# Altium PCB IPG_Rigid.PcbDoc (part 4 of 13)
Units mm, origin at the board's own origin, x right, y up, seen from the top; angles counter-clockwise.
Board outline 69.6 x 90.73 mm, 10 copper layers (TOP, DHOR, DVERT, GND 1, POWER, GND 2, GND 3, AVERT, AHOR, BOT), stack 1.198 mm thick; 745 components, 398 nets, 1997 pads, 2678 vias.
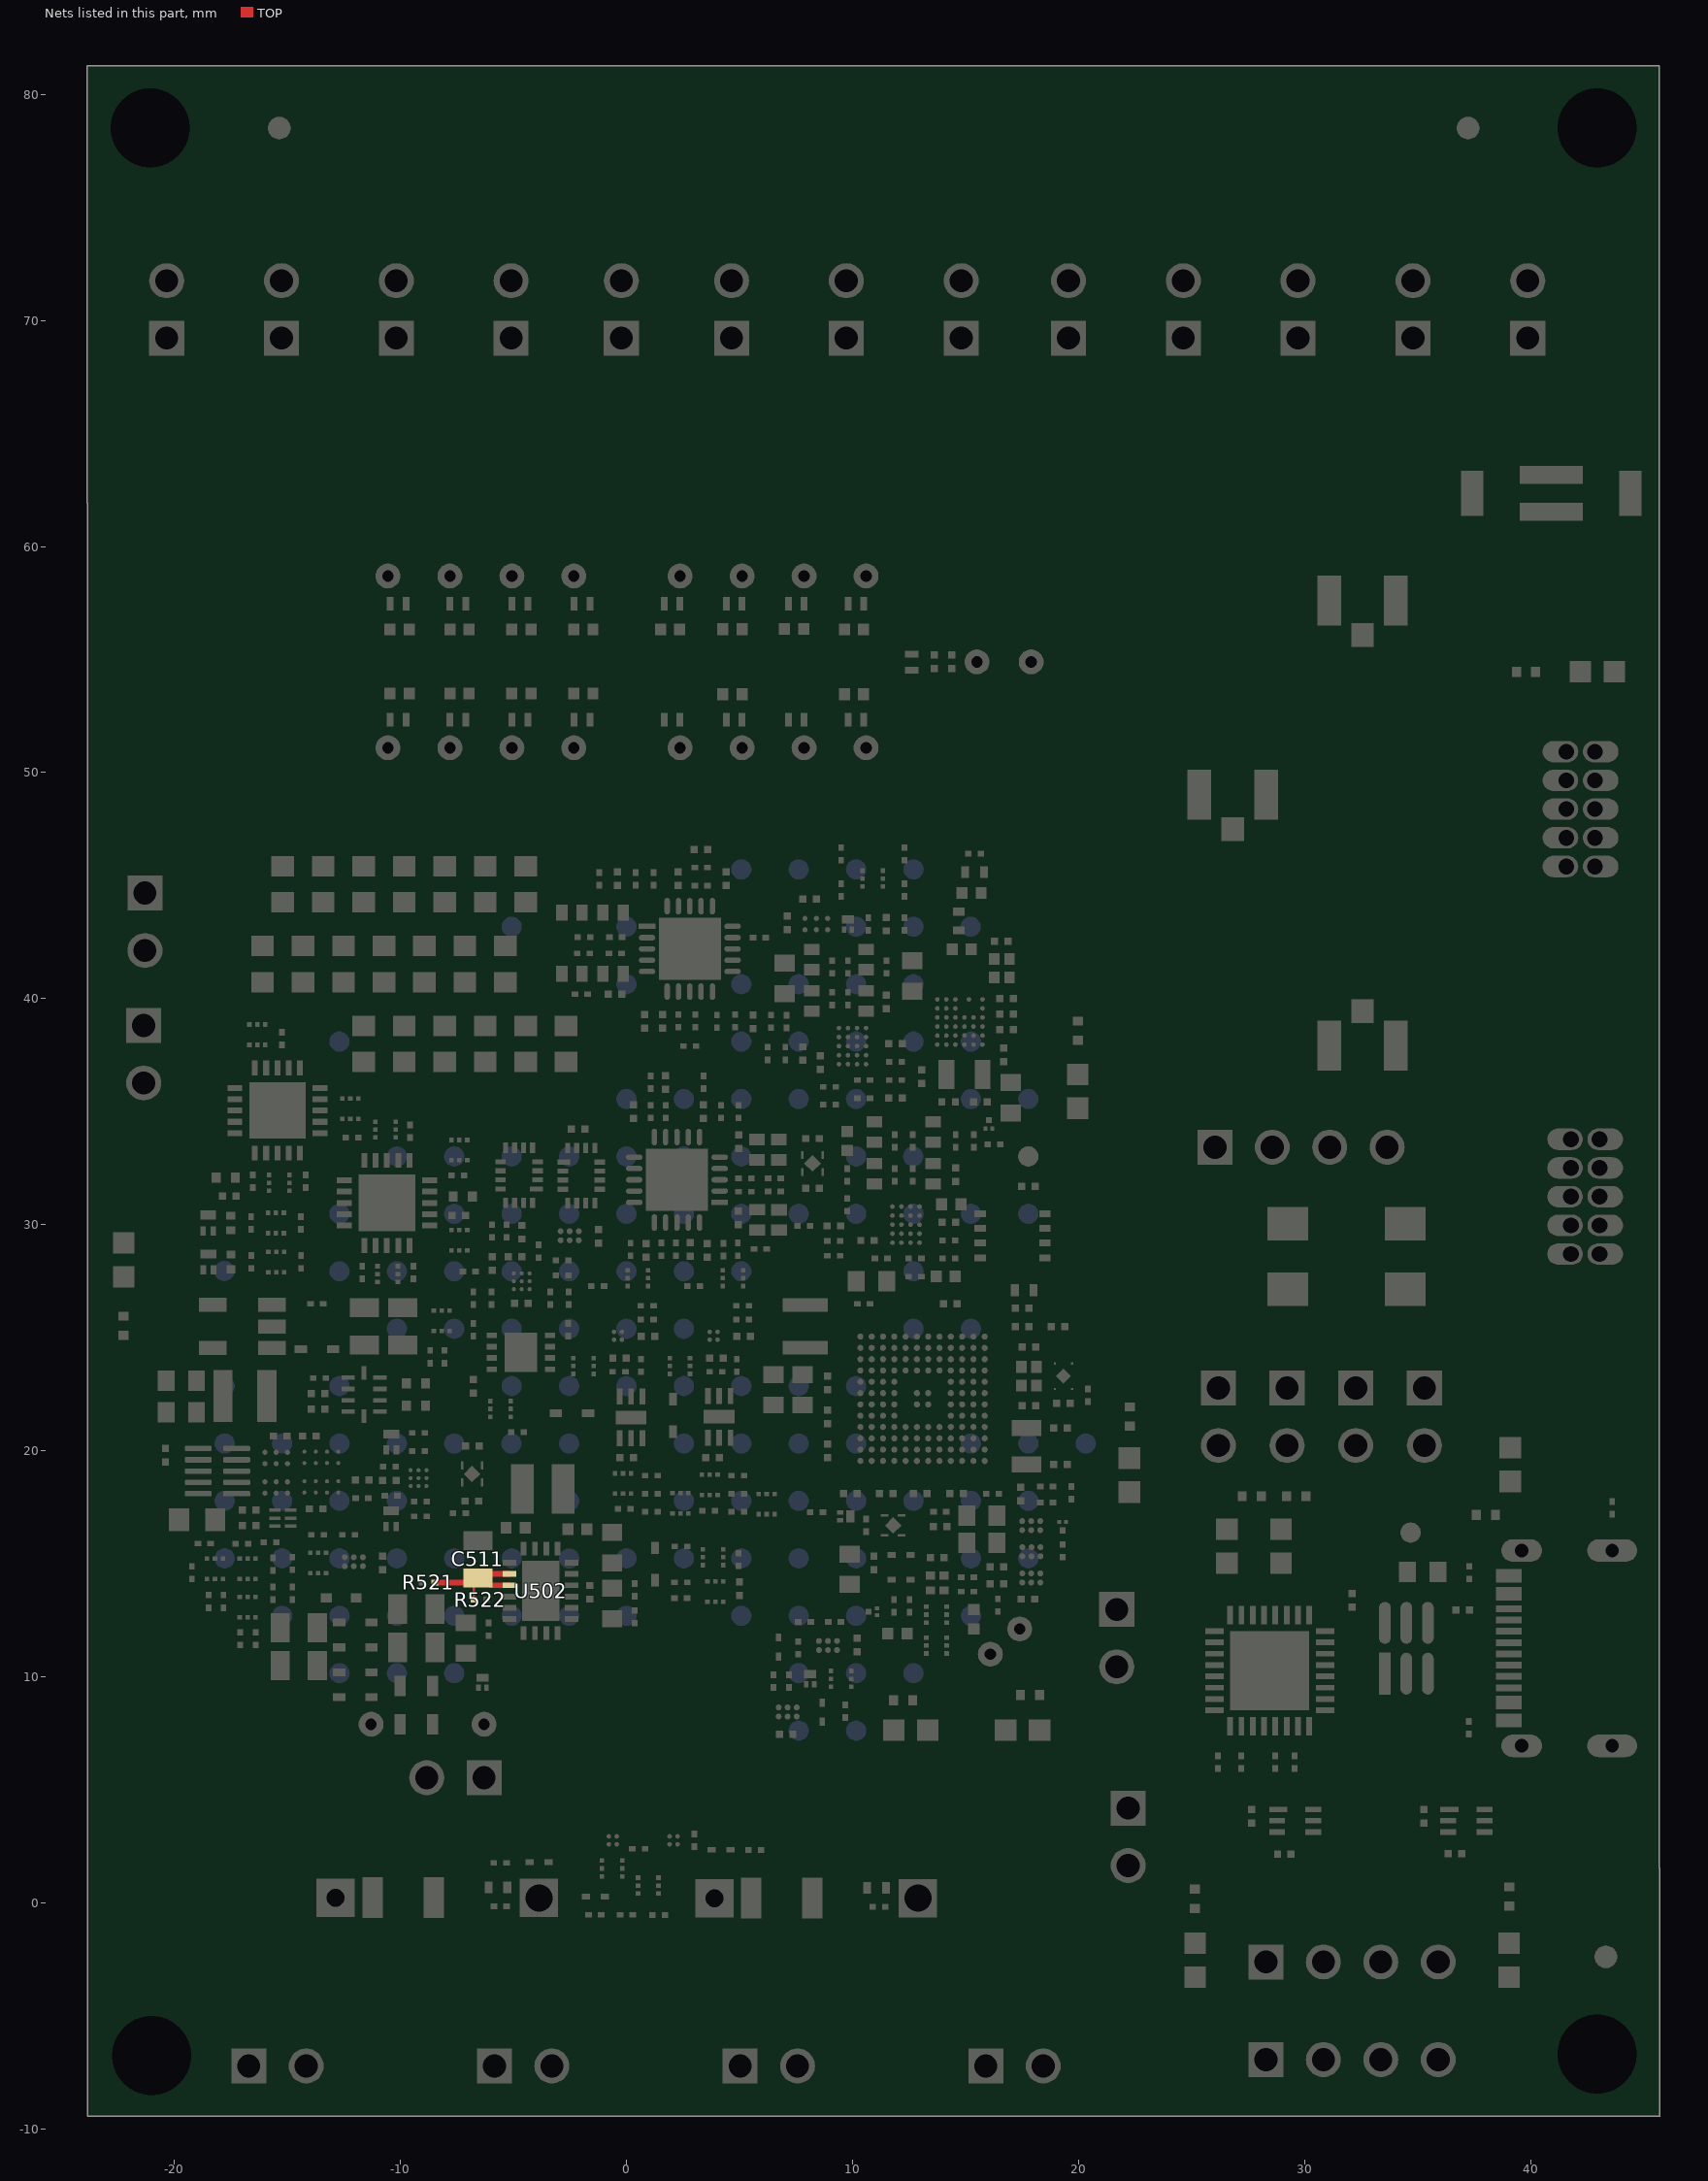
[diagram p11: the nets of this part, all layers, seen from the top]

## Part data (continued)
C602 C605: "Ceramic Capacitor, Multilayer, Ceramic, 25V, 10% +Tol, 10% -Tol, X7R, 15% TC, 0.00047uF, Surface Mount, 0201", Capacitor Type=Ceramic, Case/Package=0201, Manufacturer=Murata, Max Operating Temperature=125°C, Min Operating Temperature=-55°C, Package Shape=Rectangular, Package Style=SMTMeter, Rated DC Voltage (URdc)=25V, Supplier Part Number=490-17744-1-ND, Temperature Characteristics Code=X7R, Tolerance  (fill in as +-)=10%, Category="Ceramic Capacitors", ComponentLink1Description=https://psearch.en.murata.com:443/capacitor/product/GCM033R71E471KA03%23.pdf?src-supplier=IHS+Markit, ComponentLink1URL=https://psearch.en.murata.com:443/capacitor/product/GCM033R71E471KA03%23.pdf?src-supplier=IHS+Markit, ComponentLink2Description=https://datasheet.ciiva.com/11604/product-11604532.pdf?src-supplier=Avnet, ComponentLink2URL=https://datasheet.ciiva.com/11604/product-11604532.pdf?src-supplier=Avnet, ComponentLink3Description=https://datasheet.ciiva.com/163/s0717e-163390.pdf?src-supplier=Digikey, ComponentLink3URL=https://datasheet.ciiva.com/163/s0717e-163390.pdf?src-supplier=Digikey, Dielectric Material=Ceramic, Height=0.33mm, JESD-609 Code=e3, Length=0.6mm, Manufacturer Part Number=GCM033R71E471KA03D, Mounting Technology="Surface Mount", Multilayer=Yes, Packaging="Tape and Reel", Pins=2, Pricing="1=0,1, 10=0,028, 50=0,016, 100=0,0125, 500=0,00938, 1000=0,00736, 2500=0,0067, 5000=0,00616 (USD)", Reach SVHC Compliant=Yes, Reference Standard=AEC-Q200, RoHS=Yes, RoHS Compliant=Yes, Stock=21174, Supplier=Digikey, Supplier 1="Arrow Electronics", Supplier Part Number 1=GCM033R71E471KA03D, Terminal Finish=Nickel, Termination=Wraparound, Tolerance (fill in as +-)=10%, Width=0.3mm
C800: "Capacitor, 10uf, X5R, 10V, 20%, 0402, Implant-grade", Manufacturer=Murata, Medical Grade MFR=TBD, Package Description=0402, Rating=10V, Supplier Part Number 1=2114729, Category=Capacitor, Length (mm)="1.00 ±0.22", Manufacturer Part Number=ZRB15XR61A106ME01D, Medical Grade MFR PN=TBD, PCB Footprint=cap0402_reduced, Supplier 1="Future Electronics", Thickness (mm)="0.65 ±0.2", Width (mm)="0.50 ±0.2"
C802: "Capacitor, 10uf, X5R, 10V, 20%, 0402, Implant-grade", Manufacturer=Murata, Medical Grade MFR=TBD, Package Description=0402, Rating=10V, Category=Capacitor, Length (mm)="1.00 ±0.22", Manufacturer Part Number=ZRB15XR61A106ME01D, Medical Grade MFR PN=TBD, PCB Footprint=cap0402_reduced, Supplier 1="Arrow Electronics", Supplier Part Number 1=ZRB15XR61A106ME01D, Thickness (mm)="0.65 ±0.2", Width (mm)="0.50 ±0.2"
C1000 C1015: "Ceramic Capacitor, Multilayer, Ceramic, 6.3V, 20% +Tol, 20% -Tol, X5R, 15% TC, 1.5uF, Surface Mount, 0201", Capacitor Type=Ceramic, Case/Package=0201, Manufacturer=Murata, Max Operating Temperature=85°C, Min Operating Temperature=-55°C, Package Shape=Rectangular, Rated DC Voltage (URdc)=6.3V, Supplier Part Number=490-13223-1-ND, Temperature Characteristics Code=X5R, Tolerance  (fill in as +-)=20%, Category="Ceramic Capacitors", ComponentLink1Description=https://psearch.en.murata.com:443/capacitor/product/GRM033R60J155ME14%23.pdf?src-supplier=IHS+Markit, ComponentLink1URL=https://psearch.en.murata.com:443/capacitor/product/GRM033R60J155ME14%23.pdf?src-supplier=IHS+Markit, ComponentLink2Description=http://search.murata.co.jp/Ceramy/image/img/A01X/G101/ENG/GRM033R60J155ME14-01.pdf?src-supplier=Digikey, ComponentLink2URL=http://search.murata.co.jp/Ceramy/image/img/A01X/G101/ENG/GRM033R60J155ME14-01.pdf?src-supplier=Digikey, ComponentLink3Description=http://search.murata.co.jp/Ceramy/image/img/A01X/partnumbering_e_01.pdf?src-supplier=Digikey, ComponentLink3URL=http://search.murata.co.jp/Ceramy/image/img/A01X/partnumbering_e_01.pdf?src-supplier=Digikey, Dielectric Material=Ceramic, Manufacturer Part Number=GRM033R60J155ME14D, Mounting Technology="Surface Mount", Multilayer=Yes, Packaging="Tape and Reel", Pins=2, Pricing="1=0,2, 10=0,131, 50=0,083, 100=0,0664, 500=0,04794, 1000=0,04241, 2500=0,04056, 5000=0,03687 (USD)", Reach SVHC Compliant=Yes, RoHS=Yes, RoHS Compliant=Yes, Stock=47845, Supplier=Digikey, Supplier 1="Arrow Electronics", Supplier Part Number 1=GRM033R60J155ME14D, Termination=Wraparound, Tolerance (fill in as +-)=20%
C1001 C1007 C1016 C1022: "Ceramic Capacitor, Multilayer, Ceramic, 16V, 20% +Tol, 20% -Tol, X5R, 15% TC, 0.018uF, Surface Mount, 0201", Capacitor Type=Ceramic, Case/Package=0201, Manufacturer=Murata, Max Operating Temperature=85°C, Min Operating Temperature=-55°C, Package Shape=Rectangular, Package Style=SMTMeter, Rated DC Voltage (URdc)=16V, Supplier Part Number 1=490-10414-1-ND, Temperature Characteristics Code=X5R, Tolerance  (fill in as +-)=20%, Category="Ceramic Capacitors", ComponentLink1Description=https://psearch.en.murata.com:443/capacitor/product/GRM033R61C223ME84%23.pdf?src-supplier=IHS+Markit, ComponentLink1URL=https://psearch.en.murata.com:443/capacitor/product/GRM033R61C223ME84%23.pdf?src-supplier=IHS+Markit, ComponentLink2Description=http://www.farnell.com/datasheets/2735417.pdf?src-supplier=Farnell, ComponentLink2URL=http://www.farnell.com/datasheets/2735417.pdf?src-supplier=Farnell, ComponentLink3Description=http://search.murata.co.jp/Ceramy/image/img/A01X/G101/ENG/GRM033R61C223ME84-01.pdf?src-supplier=Digikey, ComponentLink3URL=http://search.murata.co.jp/Ceramy/image/img/A01X/G101/ENG/GRM033R61C223ME84-01.pdf?src-supplier=Digikey, Dielectric Material=Ceramic, Height=0.3mm, JESD-609 Code=e3, Length=0.6mm, Manufacturer Part Number=GRM033R61C183KE84D, Mounting Technology="Surface Mount", Multilayer=Yes, Packaging="Tape and Reel", Pins=2, Pricing="1=0,1, 10=0,044, 50=0,0254, 100=0,0196, 500=0,01478, 1000=0,01161, 2500=0,01056, 5000=0,00971 (USD)", Reach SVHC Compliant=Yes, RoHS=Yes, RoHS Compliant=Yes, Stock=109140, Supplier 1=Digikey, Terminal Finish=Nickel, Termination=Wraparound, Tolerance (fill in as +-)=20%, Width=0.3mm
C1002 C1008: "Capacitor, 0.33uF, X7S, 16V, 10%, 0402", Manufacturer=TDK, Medical Grade MFR=TBD, Package Description=0402, Rating=16V, Category=Capacitor, Length (mm)="1.00 ±0.05", Manufacturer Part Number=CGA2B1X7S1C334K050BC, Medical Grade MFR PN=TBD, PCB Footprint=cap0402_reduced, Review=020823, Status=Approved, Supplier 1="Arrow Electronics", Supplier Part Number 1=CGA2B1X7S1C334K050BC, Thickness (mm)="0.50 ±0.05", Width (mm)="0.50 ±0.05"
C1009 C1010 C1013 C1024 C1025: "Ceramic Capacitor, Multilayer, Ceramic, 25V, 10% +Tol, 10% -Tol, X7R, 15% TC, 0.001uF, Surface Mount, 0201", Capacitor Type=Ceramic, Case/Package=0201, Manufacturer=Murata, Max Operating Temperature=125°C, Min Operating Temperature=-55°C, Package Shape=Rectangular, Package Style=SMTMeter, Rated DC Voltage (URdc)=25V, Supplier Part Number=490-8161-1-ND, Temperature Characteristics Code=X7R, Tolerance  (fill in as +-)=10%, Category="Ceramic Capacitors", ComponentLink1Description=https://psearch.en.murata.com:443/capacitor/product/GRM033R71E102KA01%23.pdf?src-supplier=IHS+Markit, ComponentLink1URL=https://psearch.en.murata.com:443/capacitor/product/GRM033R71E102KA01%23.pdf?src-supplier=IHS+Markit, ComponentLink2Description=https://datasheet.ciiva.com/5453/product-5453157.pdf?src-supplier=Mouser, ComponentLink2URL=https://datasheet.ciiva.com/5453/product-5453157.pdf?src-supplier=Mouser, ComponentLink3Description=https://datasheet.ciiva.com/11621/product-11621675.pdf?src-supplier=Avnet, ComponentLink3URL=https://datasheet.ciiva.com/11621/product-11621675.pdf?src-supplier=Avnet, Dielectric Material=Ceramic, Height=0.3mm, JESD-609 Code=e3, Length=0.6mm, Manufacturer Part Number=GRM033R71E102KA01J, Mounting Technology="Surface Mount", Multilayer=Yes, Packaging="Tape and Reel", Pins=2, Pricing="1=0,1, 10=0,01, 50=0,0056, 100=0,0044, 500=0,00328, 1000=0,00258, 2500=0,00234, 5000=0,00216 (USD)", Reach SVHC Compliant=Yes, RoHS=Yes, RoHS Compliant=Yes, Stock=136185, Supplier=Digikey, Supplier 1="Arrow Electronics", Supplier Part Number 1=GRM033R71E102KA01J, Terminal Finish=Nickel, Termination=Wraparound, Tolerance (fill in as +-)=10%, Width=0.3mm
C1012: "Capacitor, 1500pF, X7R, 50V, 10%, 0402", Manufacturer=Murata, Medical Grade MFR=TBD, Package Description=0402, Rating=50V, Category=Capacitor, Length (mm)="1.00 ±0.05", Manufacturer Part Number=GCM155R71H152KA37D, Medical Grade MFR PN=TBD, PCB Footprint=cap0402_reduced, Review=020823, Status=Approved, Supplier 1="Arrow Electronics", Supplier Part Number 1=GCM155R71H152KA37D, Thickness (mm)="0.50 ±0.05", Width (mm)="0.50 ±0.05"
C1014 C1029: "Ceramic Capacitor, Multilayer, Ceramic, 25V, 10% +Tol, 10% -Tol, X7R, 15% TC, 0.00033uF, Surface Mount, 0201", Capacitor Type=Ceramic, Case/Package=0201, Manufacturer=Murata, Max Operating Temperature=125°C, Min Operating Temperature=-55°C, Package Shape=Rectangular, Package Style=SMTMeter, Rated DC Voltage (URdc)=25V, Supplier Part Number=490-3178-1-ND, Temperature Characteristics Code=X7R, Tolerance  (fill in as +-)=10%, Category="Ceramic Capacitors", ComponentLink1Description=https://psearch.en.murata.com:443/capacitor/product/GRM033R71E331KA01%23.pdf?src-supplier=IHS+Markit, ComponentLink1URL=https://psearch.en.murata.com:443/capacitor/product/GRM033R71E331KA01%23.pdf?src-supplier=IHS+Markit, ComponentLink2Description=https://datasheet.ciiva.com/16396/product-16396160.pdf?src-supplier=Future+Electronics, ComponentLink2URL=https://datasheet.ciiva.com/16396/product-16396160.pdf?src-supplier=Future+Electronics, ComponentLink3Description=https://datasheet.ciiva.com/18184/getdatasheetpartid-228493-18184123.pdf?src-supplier=Verical, ComponentLink3URL=https://datasheet.ciiva.com/18184/getdatasheetpartid-228493-18184123.pdf?src-supplier=Verical, ComponentLink4Description=https://datasheet.ciiva.com/29199/455855-da-01-en-vs-kondensator-0201-29199192.pdf?src-supplier=Conrad, ComponentLink4URL=https://datasheet.ciiva.com/29199/455855-da-01-en-vs-kondensator-0201-29199192.pdf?src-supplier=Conrad, ComponentLink5Description=https://datasheet.ciiva.com/6068/482872-6068150.pdf?src-supplier=Farnell, ComponentLink5URL=https://datasheet.ciiva.com/6068/482872-6068150.pdf?src-supplier=Farnell, ComponentLink6Description=https://datasheet.ciiva.com/7937/482872-7937607.pdf?src-supplier=Element14, ComponentLink6URL=https://datasheet.ciiva.com/7937/482872-7937607.pdf?src-supplier=Element14, ComponentLink7Description=https://datasheet.ciiva.com/7937/482872-7937608.pdf?src-supplier=Element14, ComponentLink7URL=https://datasheet.ciiva.com/7937/482872-7937608.pdf?src-supplier=Element14, ComponentLink8Description=https://datasheet.ciiva.com/161/grm033r71e331ka01-01-161478.pdf?src-supplier=Digikey, ComponentLink8URL=https://datasheet.ciiva.com/161/grm033r71e331ka01-01-161478.pdf?src-supplier=Digikey, ComponentLink9Description=https://datasheet.ciiva.com/161/grm033r71e331ka01-01-161479.pdf?src-supplier=Digikey, ComponentLink9URL=https://datasheet.ciiva.com/161/grm033r71e331ka01-01-161479.pdf?src-supplier=Digikey, ComponentLink10Description=https://datasheet.ciiva.com/11604/product-11604876.pdf?src-supplier=Avnet, ComponentLink10URL=https://datasheet.ciiva.com/11604/product-11604876.pdf?src-supplier=Avnet, Dielectric Material=Ceramic, Height=0.3mm, JESD-609 Code=e3, Length=0.6mm, Manufacturer Part Number=GRM033R71E331KA01D, Mounting Technology="Surface Mount", Multilayer=Yes, Packaging="Tape and Reel", Pins=2, Pricing="1=0,1, 10=0,02, 50=0,0118, 100=0,0091, 500=0,00684, 1000=0,00538, 2500=0,00489, 5000=0,0045 (USD)", Reach SVHC Compliant=Yes, RoHS=Yes, RoHS Compliant=Yes, Stock=408699, Supplier=Digikey, Supplier 1="Arrow Electronics", Supplier Part Number 1=GRM033R71E331KA01D, Terminal Finish=Nickel, Termination=Wraparound, Tolerance (fill in as +-)=10%, Width=0.3mm
C1017 C1023: "Capacitor, 2.2uF, X7R, 16V, 10%, 0603, Implant-grade", Manufacturer=Murata, Medical Grade MFR=TBD, Package Description=0603, Rating=16V, Supplier Part Number 1=490-GRM188Z71C225ME43JCT-ND, Category=Capacitor, Length (mm)="1.60 ±0.10", Manufacturer Part Number=GRM188Z71C225ME43J, Medical Grade MFR PN=TBD, PCB Footprint=cap0603_reduced, Review=020823, Status=Approved, Supplier 1=Digi-Key, Thickness (mm)="0.80 ±0.10", Width (mm)="0.80 ±0.10"
C1103: library part GRM033R61E104KE14J, "Ceramic Capacitor, Multilayer, Ceramic, 16V, 10% +Tol, 10% -Tol, X5R, 15% TC, 0.22uF, Surface Mount, 0201", Capacitor Type=Ceramic, Case/Package=0201, Manufacturer=Murata, Max Operating Temperature=85°C, Min Operating Temperature=-55°C, Package Shape=Rectangular, Package Style=SMTMeter, Rated DC Voltage (URdc)=25V, Supplier Part Number=490-14571-1-ND, Temperature Characteristics Code=X5R, Tolerance  (fill in as +-)=10%, Category="Ceramic Capacitors", ComponentLink1Description=https://psearch.en.murata.com:443/capacitor/product/GRM033R61E104KE14%23.pdf?src-supplier=IHS+Markit, ComponentLink1URL=https://psearch.en.murata.com:443/capacitor/product/GRM033R61E104KE14%23.pdf?src-supplier=IHS+Markit, ComponentLink2Description=http://www.mouser.com/ds/2/281/c02e-2905.pdf?src-supplier=Mouser, ComponentLink2URL=http://www.mouser.com/ds/2/281/c02e-2905.pdf?src-supplier=Mouser, ComponentLink3Description=http://search.murata.co.jp/Ceramy/image/img/A01X/G101/ENG/GRM033R61E104KE14-01.pdf?src-supplier=Digikey, ComponentLink3URL=http://search.murata.co.jp/Ceramy/image/img/A01X/G101/ENG/GRM033R61E104KE14-01.pdf?src-supplier=Digikey, ComponentLink4Description=https://search.murata.co.jp/Ceramy/image/img/A01X/G101/ENG/GRM033R61E104KE14-01.pdf?src-supplier=Digikey, ComponentLink4URL=https://search.murata.co.jp/Ceramy/image/img/A01X/G101/ENG/GRM033R61E104KE14-01.pdf?src-supplier=Digikey, Dielectric Material=Ceramic, Height=0.3mm, JESD-609 Code=e3, Length=0.6mm, Manufacturer Part Number=GRM033R61E104KE14J, Mounting Technology="Surface Mount", Multilayer=Yes, Packaging="Tape and Reel", Pins=2, Pricing="1=0,1, 10=0,033, 50=0,0192, 100=0,0148, 500=0,01118, 1000=0,00878, 2500=0,00798, 5000=0,00734 (USD)", Reach SVHC Compliant=Yes, RoHS=Yes, RoHS Compliant=Yes, Stock=1540851, Supplier=Digikey, Supplier 1=Avnet, Supplier Part Number 1=GRM033R61C224KE14D, Terminal Finish=Nickel, Termination=Wraparound, Tolerance (fill in as +-)=10%, Width=0.3mm
C1200 C1215: "Capacitor, 68pF, C0G, 25V, 5%, 0201, Implant-grade", Dielectric=C0G, Manufacturer=Murata, Medical Grade Manufacturer=TBD, Supplier Part Number 1=81-GRT0335C1E680JA2D, Tolerance=5%, Voltage Rating=25V, Category=Capacitor, Height=0.3mm, Length=0.6mm, Manufacturer Part Number=GRT0335C1E680JA02D, Medical Grade Manufacturer Part Number=TBD, Size Code="Size Code", Supplier=TBD, Supplier 1=Mouser, Supplier 2=Digikey, Supplier Part Number=TBD, Supplier Part Number 2=490-GRT0335C1E680JA02DTR-ND, Width=0.3mm
C1201 C1202 C1203 C1204 C1205 C1206 C1207 C1208 C1209 C1210 C1211 C1212 C1213 C1214: "Capacitor, 680pF, C0G, 100V, 5%, 0402", Manufacturer=TDK, Medical Grade MFR=TBD, Package Description=0402, Rating=100V, Category=Capacitor, Length (mm)="1.00 ±0.10", Manufacturer Part Number=C1005C0G2A681J050BE, Medical Grade MFR PN=TBD, PCB Footprint=TBD, Review=020823, Status=Approved, Supplier 1="Arrow Electronics", Supplier Part Number 1=C1005C0G2A681J050BE, Thickness (mm)="0.50 ±0.10", Width (mm)="0.50 ±0.10"
C1502 C1503 C1504 C1505 C1506 C1507 C1508 C1509 C1510 C1511 C1512 C1513 C1514 C1515 C1516 C1517 C1518 C1519 C1520 C1521: "Capacitor, 22uF, X5S, 25V, 20%, 0603", Manufacturer=Murata, Medical Grade MFR=N/A, Package Description=0603, Rating=25V, Supplier Part Number 1=81-GRM188C61E226ME1J, Category=Capacitor, Length (mm)=1.6mm, Manufacturer Part Number=GRM188C61E226ME01J, Medical Grade MFR PN=N/A, PCB Footprint=C0603_C, Review=020823, Status=Approved, Supplier 1=Mouser, Supplier 2=Digikey, Supplier 3=Digikey, Supplier 4=Digikey, Supplier Part Number 2=490-GRM188C61E226ME01JCT-ND, Supplier Part Number 3=490-GRM188C61E226ME01JDKR-ND, Supplier Part Number 4=490-GRM188C61E226ME01JTR-ND, Thickness (mm)=0.8mm, Width (mm)=0.8mm
D301 D401 D1405: "LED, Amber, SMD, 0603, 2.1 V, 30 mA", Forward Current=30mA, Forward Voltage=2.1V, Manufacturer=Lite-On, Power Rating="100 mW", Supplier Part Number 1=859-LTST-C190AKT, Category=LED, Height="0.55 mm", Length="1.6 mm", Manufacturer Part Number=LTST-C190AKT, Size Code=0603, Supplier 1=Mouser, Wavelength="602 nm", Width="0.8 mm"
D402: library part "LED GREEN CLEAR SMD 0603", "LED, GREEN, SMD, 0603, 3.2V, 20mA", Forward Current=20mA, Forward Voltage=3.2V, Manufacturer="Lite-On Inc.", Manufacturer Part Number=LTST-C191TGKT, Power Rating=76mW, Supplier Part Number=160-1888-2-ND, Supplier Part Number 1=LTST-C191TBKT, Category=LED, Height=0.55mm, Length=1.60mm, Size Code=0603, Supplier=Digi-Key, Supplier 1=Avnet, Wavelength=525nm, Width=0.80mm
D500 D501 D503 D504 D600 D602 D700 D703: "DIODE SCHOTTKY 40V 500MA SOD523", Manufacturer="Good-Ark Semiconductor", Medical Grade MFR=TBD, Package Description=SOD-523, Rating="40V, 500mA", Supplier Part Number 1=4786-GSBT0540XCT-ND, Category=Diode, Manufacturer Part Number=GSBT0540X, Medical Grade MFR PN=TBD, PCB Footprint=TBD, Supplier 1=Digikey
D502: "ZEN SOD523 LOW IZ REG 0.5W 22V", Breakdown Voltage="22 V", Forward Voltage="900 mV @ 10 mA", Manufacturer=onsemi, Power Dissipation="500 mW", Supplier Part Number 1=MM5Z2V4T1GOSCT-ND, Category=Diode, Height="0.6 mm", Manufacturer Part Number=MM5Z22VT5G, Mounting Type=SMD, Number of Channels=1, Supplier 1=Digikey, Type=Zener
D601 D603 D604 D605 D606 D800 D801: "Schottky, 30V, 100mA, 385mV, 200mW, SOD-923", Manufacturer="ON Semiconductor", Medical Grade MFR=TBD, Rating=30V, Supplier Part Number 1=7098145, Category=Diode, Length (mm)="1.00 ±0.05", Manufacturer Part Number=NSR0130P2T5G, Medical Grade MFR PN=TBD, PCB Footprint=TBD, Review=020823, Status=Approved, Supplier 1="Future Electronics", Thickness (mm)="0.40 ±0.03", Width (mm)="0.60 ±0.05"
D704 D1400 D1404: library part "LED GREEN CLEAR SMD 0603", "LED, GREEN, SMD, 0603, 3.2V, 20mA", Forward Current=20mA, Forward Voltage=3.2V, Manufacturer="Lite-On Inc.", Power Rating=76mW, Supplier Part Number=160-1888-2-ND, Category=LED, Height=0.55mm, Length=1.60mm, Manufacturer Part Number=LTST-C191TGKT, Size Code=0603, Supplier=Digi-Key, Supplier Part Number 1=160-1888-2-ND, Wavelength=525nm, Width=0.80mm
  D704: Supplier 1=DigiKey
  D1400 D1404: Supplier 1=Digikey
D705: library part "LED RED CLEAR SMD 0603", "LED, RED, SMD, 0603, 2V, 30mA", Forward Current=20mA, Forward Voltage=3.2V, Manufacturer="Lite-On Inc.", Manufacturer Part Number=LTST-C191TGKT, Power Rating=76mW, Supplier Part Number=160-1888-2-ND, Category=LED, Height=0.55mm, Length=1.60mm, Size Code=0603, Supplier=Digi-Key, Supplier 1=Avnet, Supplier Part Number 1=LTST-C190KRKT, Wavelength=525nm, Width=0.80mm
D802: library part "LED ORANGE CLEAR SMD 0603", "LED, ORANGE, SMD, 0603, 2V, 30mA", Forward Current=20mA, Forward Voltage=3.2V, Manufacturer="Lite-On Inc.", Manufacturer Part Number=LTST-C191TGKT, Power Rating=76mW, Supplier Part Number=160-1888-2-ND, Category=LED, Height=0.55mm, Length=1.60mm, Size Code=0603, Supplier=Digi-Key, Supplier 1=Avnet, Supplier Part Number 1=LTST-C191KSKT, Wavelength=525nm, Width=0.80mm
D1000 D1001 D1002 D1003 D1004 D1005 D1006 D1007 D1008 D1009 D1010 D1011 D1012 D1013 D1014 D1015: "Diode", Manufacturer=Nexperia, Mouser Part Number=771-BAS116LS-QYL, Supplier Part Number 1=1727-BAS116LS-QYLCT-ND, Arrow Part Number=BAS116LS-QYL, Arrow Price/Stock=https://www.arrow.com/en/products/bas116ls-qyl/nexperia?region=nac, Datasheet Link=https://assets.nexperia.com/documents/data-sheet/BAS116LS-Q.pdf, Height=0.5mm, Manufacturer Part Number=BAS116LS-QYL, Mouser Price/Stock=https://www.mouser.co.uk/ProductDetail/Nexperia/BAS116LS-QYL?qs=Li%252BoUPsLEnuSHegtSMB1TQ%3D%3D, Supplier 1=Digikey
D1200 D1201 D1202 D1203 D1204 D1205 D1206 D1207 D1208 D1209 D1210 D1211 D1212 D1213 D1214 D1215 D1216: "Diode ESD (Bi-directional)", Manufacturer=Nexperia, Mouser Part Number=771-PESD5V0S1BLD315, Supplier Part Number 1=8158301, Arrow Part Number=PESD5V0S1BLD,315, Arrow Price/Stock=https://www.arrow.com/en/products/pesd5v0s1bld315/nexperia?region=nac, Datasheet Link=https://assets.nexperia.com/documents/data-sheet/PESD5V0S1BLD.pdf, Height=0.4mm, Manufacturer Part Number=PESD5V0S1BLD,315, Mouser Price/Stock=https://www.mouser.co.uk/ProductDetail/Nexperia/PESD5V0S1BLD315?qs=A1cBxND5mHLYeryYrbux2w%3D%3D, Supplier 1="Future Electronics"
D1401: library part "LED RED CLEAR SMD 0603", "LED, RED, SMD, 0603, 2V, 30mA", Forward Current=30mA, Forward Voltage=2V, Manufacturer="Lite-On Inc.", Manufacturer Part Number=LTST-C191KRKT, Power Rating=75mW, Supplier Part Number=160-1447-2-ND, Category=LED, Height=0.55mm, Length=1.60mm, Size Code=0603, Supplier=Digi-Key, Wavelength=631nm, Width=0.80mm
D1402: library part "LED ORANGE CLEAR SMD 0603", "LED, ORANGE, SMD, 0603, 2V, 30mA", Forward Current=30mA, Forward Voltage=2V, Manufacturer="Lite-On Inc.", Manufacturer Part Number=LTST-C191KFKT, Power Rating=75mW, Supplier Part Number=160-1445-2-ND, Category=LED, Height=0.55mm, Length=1.60mm, Size Code=0603, Supplier=Digi-Key, Wavelength=605nm, Width=0.80mm
D1403: "TVS DIODE 5.5VWM 6TSOP", Manufacturer=Nexperia, Supplier Part Number 1=1727-2751-1-ND, Manufacturer Part Number=IP4220CZ6F, RoHS Compliant=Yes, Supplier 1=Digikey
F600 F601: "Fuse, 750mA, 63V, 1206", Manufacturer=Littelfuse, Medical Grade MFR PN=0440.750WRA, Rating=750mA, Supplier Part Number 1=F1603CT-ND, Category=Fuse, Length (mm)="3.20 ±0.18", Manufacturer Part Number=0440.750WR, Medical Grade MFR=Littelfuse, PCB Footprint=fuse1206_reduced, Review=020823, Status=Approved, Supplier 1=Digi-Key, Thickness (mm)="0.84 ±0.01", Width (mm)="1.63 ±0.10"
J200 J1200 J1201 J1202 J1204 J1205 J1206 J1207 J1208 J1209 J1210 J1211 J1212 J1213 J1214 J1215 J1216 J1217: library part HOLE_20m, "FT pad, Thru-hole, 20 mil hole", Manufacturer=N/A, Package Description="FT pad", Category="FT pad", Length (mm)=TBD, Manufacturer PN=N/A, Medical Grade MFR=N/A, Medical Grade MFR PN=N/A, PCB Footprint=TBD, Rating=N/A, Thickness (mm)=N/A, Width (mm)=TBD
J301 J400: "Connector, 1.27 mm, 2x5, Male, TH", Manufacturer=Samtec, Supplier Part Number 1=200-FTSH10501FDK, Manufacturer Part Number=FTSH-105-01-F-D-K, Review=020823, Status=Approved, Supplier 1=Mouser
J403 J404 J405: "RF Connector, 1 Contact(s), Male, Board Mount, Surface Mount Terminal, Receptacle", Contact Resistance=20mR, Dielectric Withstanding Voltage (AC)=200V, Insulation Color=Beige, Insulation Resistance=500MR, Manufacturer=Hirose, Max Operating Temperature=90°C, Min Operating Temperature=-40°C, Operating Frequency-Max=6GHz, Supplier Part Number=H11891CT-ND, Body Depth=0.098inch, Body Diameter=0.079inch, Body/Shell Style=RECEPTACLE, Category="RF / Coaxial Connectors", Characteristic Impedance=50R, ComponentLink1Description=https://datasheet.ciiva.com:443/pdfs/VipMasterIC/IC/HIRO/HIROS10696/HIROS08829-1.pdf?src-supplier=IHS+Markit, ComponentLink1URL=https://datasheet.ciiva.com:443/pdfs/VipMasterIC/IC/HIRO/HIROS10696/HIROS08829-1.pdf?src-supplier=IHS+Markit, ComponentLink2Description=https://datasheet.ciiva.com/11762/0900766b8105243f-11762474.pdf?src-supplier=Rs, ComponentLink2URL=https://datasheet.ciiva.com/11762/0900766b8105243f-11762474.pdf?src-supplier=Rs, ComponentLink3Description=https://datasheet.ciiva.com/7651/91524-7651914.pdf?src-supplier=Element14, ComponentLink3URL=https://datasheet.ciiva.com/7651/91524-7651914.pdf?src-supplier=Element14, ComponentLink4Description=https://datasheet.ciiva.com/7651/91524-7651915.pdf?src-supplier=Element14, ComponentLink4URL=https://datasheet.ciiva.com/7651/91524-7651915.pdf?src-supplier=Element14, Connector Type="RF CONNECTOR", Contact Finish - Mating=GOLD, Contact Finish - Termination=GOLD, Contact Gender=Male, Contact Material=Bronze, Contact Style=Coax, Coupling Type=Snap, DIN Conformance=No, Durability=30Cycles, Filter Feature=No, IEC Conformance=No, Insertion Loss=0.05dB, Insulation Material=Polymer, JESD-609 Code=e4, Manufacturer Part Number=U.FL-R-SMT-1(10), Mating Information="MULTIPLE MATING PARTS AVAILABLE", MIL Conformance=No, Mounting Option 1=LOCKING, Mounting Style=STRAIGHT, Mounting Technology=Board, Number of Contacts=1, Number of Ports=1, Option="General Purpose", Panel Mount=No, Pricing="1=1,35, 10=1,138, 25=1,092, 50=1,0686, 100=1,0221, 250=0,9292, 500=0,83628, 1000=0,74336 (USD)", Reach SVHC Compliant=Yes, Reference Standard=UL, Reliability=COMMERCIAL, RoHS=Yes, RoHS Compliant=Yes, Shell Finish=Silver, Shell Material=CuSn, Stock=112692, Supplier=Digi-Key, Supplier 1=Digikey, Supplier Part Number 1=H11891CT-ND, Termination=SMD/SMT, VSWR=1.5
J500 J501 J507 J508: "Coil TH pad, 20mil", Manufacturer=N/A, Category="Coil Solder Pad", Length (mm)=TBD, Manufacturer PN=N/A, Medical Grade MFR=N/A, Medical Grade MFR PN=N/A, Package Description=N/A, PCB Footprint=TBD, Rating=N/A, Thickness (mm)=N/A, Width (mm)=TBD
J502 J503 J504 J505 J506 J602 J605 J1203 J1218 J1219 J1220 J1221 J1222 J1223 J1224 J1225 J1226 J1229 J1230 J1233 JP1400 JP1401 JP1402 JP1403 JP1501 JP1502: "Conn Unshrouded Header HDR 2 POS 2.54mm Solder ST Thru-Hole", Color=Black, Flammability Rating="UL94 V-0", Manufacturer=Samtec, Max Current Rating=7.6A, Max Operating Temperature=125°C, Max Voltage Rating (AC)=550V, Min Operating Temperature=-55°C, Package Quantity=1, Supplier Part Number=12P1301, Supplier Part Number 1=SAM1077-02-ND, Temperature Range="-55 to 125 degC", Category=Connectors, ComponentLink1Description="Manufacturer URL", ComponentLink1URL=http://www.samtec.com, ComponentLink2Description=Datasheet, ComponentLink2URL=http://www.samtec.com/documents/webfiles/pdf/TSW_TH.PDF, ComponentLink3Description="Package Specification", ComponentLink3URL=http://www.samtec.com/documents/webfiles/cpdf/TSW-XXX-XX-XXX-X-XX-XXX-MKT.pdf, ComponentLink4Description=https://datasheet.ciiva.com/10281/htsw-th-10281416.pdf?src-supplier=Avnet, ComponentLink4URL=https://datasheet.ciiva.com/10281/htsw-th-10281416.pdf?src-supplier=Avnet, ComponentLink5Description=https://datasheet.ciiva.com/6887/tsw-xxx-xx-xxx-x-xx-xxx-mkt-6887237.pdf?src-supplier=Digi-Key, ComponentLink5URL=https://datasheet.ciiva.com/6887/tsw-xxx-xx-xxx-x-xx-xxx-mkt-6887237.pdf?src-supplier=Digi-Key, Connector Type=Header, Contact Finish - Mating=GOLD, Contact Material=Bronze, Contact Mating Length=0.23inch, Contact Plating=Gold, Contact Shape=Square, Contact Type="Male Pin", DatasheetVersion=F-214, Depth=2.54mm, Fastening Type=Pull, Gender=Male, Housing Color=Black, Housing Material=Polyester, Insulation Color=Black, Insulation Material=PBT, Lead Free="Lead Free", Length=5.08mm, Manufacturer Part Number=TSW-102-26-G-S, Mounting Technology=Through-hole, Number of Contacts=2, Number of Positions=2, Number of Rows=1, Orientation=Vertical, PackageDescription=".025[0.64] SQ. Post Terminal Strip Assembly", PackageReference=TSW-102-26-XX-S, PackageVersion="DM, 8/1988", Packaging=Bulk, PartNumber=TSW-102-26-G-S, Pitch="2.54 mm", Pricing="1=0.51000, 10=0.47500, 100=0.33200, 500=0.28400, 1000=0.23700, 2500=0.21000, 5000=0.20400 (USD)", Radiation Hardening=No, Reach SVHC Compliant=Yes, RoHS=True, RoHS Compliant=Yes, Series=TSW, Stock=3117, Supplier=Newark, Supplier 1=Digikey, Termination=Solder, Width=2.54mm
J600 J603: "Positive terminal battery PTH connector for the QL0200I-A battery", Manufacturer=Quallion, Manufacturer Part Number=QL0200I-A, Medical Grade MFR=N/A, Category=Connector, Length (mm)=TBD, Medical Grade MFR PN=N/A, PCB Footprint=TBD, Rating=N/A, Thickness (mm)=TBD, Type="Battery Connector", Width (mm)=TBD
J601 J604: "Negative terminal battery PTH connector for the QL0200I-A battery", Manufacturer=Quallion, Manufacturer Part Number=QL0200I-A, Medical Grade MFR=N/A, Category=Connector, Length (mm)=TBD, Medical Grade MFR PN=N/A, PCB Footprint=TBD, Rating=N/A, Thickness (mm)=TBD, Type="Battery Connector", Width (mm)=TBD
J1300 J1401 J1402: "Board Connector, 4 Contact(s), 1 Row(s), Male, Straight, 0.1 inch Pitch, Solder Terminal, Black Insulator, Receptacle", Flammability Rating="UL94 V-0", Insulation Color=Black, Manufacturer=Samtec, PartNumber=TSW-106-07-G-S, Supplier Part Number 1=SAM1029-04-ND, Temperature Range="-55 to 125 degC", Additional Feature=E.L.P., Body Breadth=0.1inch, Body Depth=0.1inch, Body/Shell Style=RECEPTACLE, Category="Board to Board Connectors", ComponentLink1Description="Manufacturer URL", ComponentLink1URL=http://www.samtec.com, ComponentLink2Description=Datasheet, ComponentLink2URL=http://www.samtec.com/documents/webfiles/pdf/TSW_TH.PDF, ComponentLink3Description="Package Specification", ComponentLink3URL=http://www.samtec.com/documents/webfiles/cpdf/TSW-XXX-XX-XXX-X-XX-XXX-MKT.pdf, ComponentLink4Description=https://datasheet.ciiva.com:443/pdfs/VipMasterIC/IC/SAMI/SAMI-S-A0003531373/SAMI-S-A0003531373-1.pdf?src-supplier=IHS+Markit, ComponentLink4URL=https://datasheet.ciiva.com:443/pdfs/VipMasterIC/IC/SAMI/SAMI-S-A0003531373/SAMI-S-A0003531373-1.pdf?src-supplier=IHS+Markit, ComponentLink5Description=https://datasheet.ciiva.com/6889/tsw-xxx-xx-xxx-x-xx-xxx-mkt-6889291.pdf?src-supplier=Digi-Key, ComponentLink5URL=https://datasheet.ciiva.com/6889/tsw-xxx-xx-xxx-x-xx-xxx-mkt-6889291.pdf?src-supplier=Digi-Key, Connector Type="BOARD CONNECTOR", Contact Finish - Mating="GOLD (10) OVER NICKEL (50)", Contact Finish - Termination="Gold (Au) - with Nickel (Ni) barrier", Contact Gender=Male, Contact Material=Bronze, Contact Pattern=RECTANGULAR, Contact Style="SQ PIN-SKT", DatasheetVersion=F-214, DIN Conformance=No, Filter Feature=No, IEC Conformance=No, Insulation Material=Glass, JESD-609 Code=e4, Manufacturer Part Number=TSW-104-07-G-S, Mating Contact Pitch=0.1inch, Mating Information="MULTIPLE MATING PARTS AVAILABLE", MIL Conformance=No, Mixed Contacts=No, Mounting Style=STRAIGHT, Mounting Technology=Through-hole, Number Of Connectors=1, Number of Contacts=4, Number Of PCB Rows=1, Number of Rows Loaded=1, Option="General Purpose", Orientation=Vertical, PackageDescription=".025[0.64] SQ. Post Terminal Strip Assembly", PackageReference=TSW-106-07-X-S, PackageVersion="DM, 8/1988", PCB Contact Pattern=RECTANGULAR, Pitch="2.54 mm", Plating Thickness=10uin, Pricing="1=0,59, 50=0,46, 100=0,37, 500=0,32, 1000=0,24, 2000=0,21, 5000=0,15 (USD)", Reach SVHC Compliant=Yes, Reference Standard=UL, Reliability=COMMERCIAL, RoHS=True, RoHS Compliant=Yes, Stock=5100, Supplier="Arrow Electronics", Supplier 1=Digikey, Supplier Part Number=TSW-104-07-G-S, Terminal Length=0.1inch, Terminal Pitch=2.54mm, Termination=Solder
J1400: "CONN RCP USB2.0 TYP C 16P SMD RA", Current Rating=0.25/1.25/5A, Manufacturer=Molex, Supplier Part Number 1=538-217179-0001, Temperature="-30°C to +85°C", Voltage Rating=30V, ComponentLink2Description=Datasheet, ComponentLink2URL=https://www.molex.com/webdocs/datasheets/pdf/en-us/1054500101_IO_CONNECTORS.pdf, Conn Orientation="Right Angle", Contact Material=Gold,Nickel, Manufacturer Part Number=217179-0001, Number of Contacts=16, RoHS=TRUE, Shielding=true, Supplier 1=Mouser, Usb Standard="USB 2.0"
L300: "Inductor, 2.2uH, 1.76A, 1008", Manufacturer=TDK, Rating=1.76A, Category=Inductor, Manufacturer Part Number=VLS252010HBX-2R2M-1, Review=020823, Status=Approved, Supplier 1="Arrow Electronics", Supplier Part Number 1=VLS252010HBX-2R2M-1
L301: "Inductor, Unshielded, 33nH, 350mA, 0402", Manufacturer=Murata, Medical Grade MFR=TBD, Category=Inductor, Length (mm)=TBD, Manufacturer Part Number=LQG15HS33NJ02D, Medical Grade MFR PN=TBD, PCB Footprint=TBD, Review=020823, Status=Approved, Supplier 1="Arrow Electronics", Supplier 2="Arrow Electronics", Supplier 3="Arrow Electronics", Supplier Part Number 1=LQG15HS33NJ02D, Supplier Part Number 2=LQG15HS33NJ02D, Supplier Part Number 3=LQG15HS33NJ02D, Thickness (mm)=TBD, Width (mm)=TBD
L400: "Inductor, 3.9nH, 1.95A, 2%, 0402", Current Rating=1.95A, Current Saturation=-, DC Resistance=30mOhms, Manufacturer=Murata, Medical Grade Manufacturer=TBD, Supplier Part Number 1=81-LQW15AN3N9G80D, Tolerance=2%, Category=Inductor, Height=0.5mm, Length=1mm, Manufacturer Part Number=LQW15AN3N9G80D, Medical Grade Manufacturer Part Number=TBD, Shielding=Unshielded, Size Code=0402, Supplier=TBD, Supplier 1=Mouser, Supplier 2=Digikey, Supplier 3=Digikey, Supplier 4=Digikey, Supplier Part Number=TBD, Supplier Part Number 2=490-LQW15AN3N9G80DCT-ND, Supplier Part Number 3=490-LQW15AN3N9G80DDKR-ND, Supplier Part Number 4=490-LQW15AN3N9G80DTR-ND, Temperature Coefficient=-, Width=0.6mm
L401: "Inductor, 1.8nH, 0.46A, Tolerance 0.2 nH, 0402", Current Rating="0.46 A", Current Saturation=-, DC Resistance="160 mOhms", Manufacturer=Murata, Medical Grade Manufacturer=TBD, Supplier Part Number 1=81-LQW15AN1N8C00D, Tolerance="0.2 nH", Category=Inductor, Height=0.5mm, Length=1mm, Manufacturer Part Number=LQW15AN1N8C00D, Medical Grade Manufacturer Part Number=TBD, Shielding=Unshielded, Size Code=0402, Supplier=TBD, Supplier 1=Mouser, Supplier 2=Digikey, Supplier 3=Digikey, Supplier 4=Digikey, Supplier Part Number=TBD, Supplier Part Number 2=490-14479-1-ND, Supplier Part Number 3=490-14479-6-ND, Supplier Part Number 4=490-14479-2-ND, Temperature Coefficient=-, Width=0.6mm
L500: "6.8 µH Unshielded Wirewound Inductor 1.3 A 265mOhm Max 1008 (2520 Metric)", Manufacturer="Taiyo Yuden", Medical Grade MFR=TBD, Rating=1.3A, Supplier Part Number 1=587-LSEUC2520KKT6R8MCT-ND, Category=Inductor, Length (mm)="2.50 ±0.20", Manufacturer Part Number=LSEUC2520KKT6R8M, Medical Grade MFR PN=TBD, PCB Footprint=TBD, Supplier 1=DigiKey, Thickness (mm)=1.00, Width (mm)="2.00 ±0.20"
L600 L601: library part IND_DNP_0402, "DNP: Inductor, DNP, 0402", Manufacturer=N/A, Package Description=0402, Category=Inductor, Length (mm)=1.11, Manufacturer PN=N/A, Medical Grade MFR=N/A, Medical Grade MFR PN=N/A, PCB Footprint=ind0402_reduced, Rating=N/A, Review=020823, Status=Approved, Thickness (mm)=0.65, Width (mm)=0.66
L700: "Inductor, 10uH, 600mA, 20%, 1008", Manufacturer=Wurth, Medical Grade MFR=TBD, Rating=600mA, Supplier Part Number 1=7922736P, Category=Inductor, Length (mm)="2.50 ±0.20", Manufacturer Part Number=74438323100, Medical Grade MFR PN=TBD, PCB Footprint=TBD, Review=020823, Status=Approved, Supplier 1=Rs, Thickness (mm)=1.00, Width (mm)="2.00 ±0.20"
M400 M508 M801: "MOSFET, P-chan, -20V, -383mA, DFN0604", Manufacturer="Diodes Inc", Medical Grade MFR=TBD, Rating=-20V, Supplier Part Number 1=31-DMP22D4UFO-7BCT-ND, Category=Transistor, Length (mm)="0.60 ±0.05", Manufacturer Part Number=DMP22D4UFO-7B, Medical Grade MFR PN=TBD, PCB Footprint=TBD, Review=020823, Status=Approved, Supplier 1=Digi-Key, Thickness (mm)="0.36 ±0.04", Width (mm)="0.40 ±0.05"
M500 M622 M701 Q1300: "MOSFET, N-Chan, 20V, 170mA, DFN0606", Manufacturer="Diodes Inc", Medical Grade MFR=TBD, Rating=20V, Supplier Part Number 1=DMN2990UFZ-7BDICT-ND, Category=Transistor, Length (mm)="0.62 ±0.05", Manufacturer Part Number=DMN2990UFZ-7B, Medical Grade MFR PN=TBD, PCB Footprint=TBD, Review=020823, Status=Approved, Supplier 1=Digi-Key, Thickness (mm)="0.38 ±0.02", Width (mm)="0.62 ±0.05"
Q1100 Q1101: "TRANS 2PNP 40V 0.2A SOT963", Manufacturer="ON Semi", Medical Grade MFR=TBD, Package Description=SOT963, Rating=40V, Supplier Part Number 1=NST3906DP6T5GOSCT-ND, Category=Transistor, Length (mm)="1.00 ±0.05", Manufacturer Part Number=NST3906DP6T5G, Medical Grade MFR PN=TBD, PCB Footprint=TBD, Supplier 1=Digi-Key, Thickness (mm)="0.45 ±0.05", Width (mm)="1.00 ±0.05"
Q1102 Q1103 Q1118 Q1119: "Transistor, NPN, 45V, 100mA, DFN1006", Manufacturer="Diodes Inc", Medical Grade MFR=TBD, Rating=45V, Supplier Part Number 1=BC847BLP-7BDICT-ND, Category=Transistor, Length (mm)="1.00 ±0.08", Manufacturer Part Number=BC847BLP-7B, Medical Grade MFR PN=TBD, PCB Footprint=TBD, Supplier 1=Digi-Key, Thickness (mm)="0.50 ±0.03", Width (mm)="0.60 ±0.08"
R300 R301 R604 R617 R710 R1108 R1300 R1301: "Fixed Resistor, Metal Glaze/thick Film, 0.05W, 10000ohm, 30V, 1% +/-Tol, 200ppm/Cel, Surface Mount, 0201", Case/Package=0201, Manufacturer=Vishay, Max Operating Temperature=155°C, Medical Grade MFR=Mini-Systems, Medical Grade MFR PN=MWA96SM-1002F-NS62TR, Min Operating Temperature=-55°C, Package Height=0.23mm, Package Length=0.6mm, Package Shape=Rectangular, Package Style=SMTMeter, Package Width=0.3mm, Power=50mW, Rated Temperature=70°C, Resistor Type="FIXED RESISTOR", Supplier Part Number=541-10.0KABCT-ND, Supplier Part Number 1=71-CRCW0201-10K, Temperature Coefficient=200ppm/°C, Tolerance=1%, Working Voltage=30V, Category="Chip SMD Resistors", ComponentLink1Description=https://datasheet.ciiva.com:443/pdfs/VipMasterIC/IC/VISH/VISH-S-A0002932828/VISH-S-A0002932828-1.pdf?src-supplier=IHS+Markit, ComponentLink1URL=https://datasheet.ciiva.com:443/pdfs/VipMasterIC/IC/VISH/VISH-S-A0002932828/VISH-S-A0002932828-1.pdf?src-supplier=IHS+Markit, ComponentLink2Description=https://datasheet.ciiva.com/2474/crcw0201e3-2474819.pdf?src-supplier=Digikey, ComponentLink2URL=https://datasheet.ciiva.com/2474/crcw0201e3-2474819.pdf?src-supplier=Digikey, ComponentLink3Description=https://datasheet.ciiva.com/2474/crcw0201e3-2474820.pdf?src-supplier=Digikey, ComponentLink3URL=https://datasheet.ciiva.com/2474/crcw0201e3-2474820.pdf?src-supplier=Digikey, ComponentLink4Description=https://datasheet.ciiva.com/2474/crcw0201e3-2474818.pdf?src-supplier=Digikey, ComponentLink4URL=https://datasheet.ciiva.com/2474/crcw0201e3-2474818.pdf?src-supplier=Digikey, ComponentLink5Description=https://datasheet.ciiva.com/16436/dcrcwe3-16436222.pdf?src-supplier=Future+Electronics, ComponentLink5URL=https://datasheet.ciiva.com/16436/dcrcwe3-16436222.pdf?src-supplier=Future+Electronics, ComponentLink6Description=https://datasheet.ciiva.com/7983/1719906-7983320.pdf?src-supplier=Element14, ComponentLink6URL=https://datasheet.ciiva.com/7983/1719906-7983320.pdf?src-supplier=Element14, ComponentLink7Description=https://datasheet.ciiva.com/7983/1719906-7983319.pdf?src-supplier=Element14, ComponentLink7URL=https://datasheet.ciiva.com/7983/1719906-7983319.pdf?src-supplier=Element14, ComponentLink8Description=https://datasheet.ciiva.com/22692/1719906-22692709.pdf?src-supplier=Element14, ComponentLink8URL=https://datasheet.ciiva.com/22692/1719906-22692709.pdf?src-supplier=Element14, Construction=Chip, JESD-609 Code=e3, Manufacturer Part Number=CRCW020110K0FNED, Mounting Technology="Surface Mount", Packaging="Tape and Reel", Pins=2, Pricing="1=0,1, 10=0,037, 50=0,0242, 100=0,0204, 500=0,01426, 1000=0,01241, 5000=0,00924 (USD)", Reach SVHC Compliant=Yes, Reference Standard=AEC-Q200, RoHS=Yes, RoHS Compliant=Yes, Stock=1011530, Supplier=Digikey, Supplier 1=Mouser, Technology="METAL GLAZE/THICK FILM", Terminal Finish=Nickel, Termination=Wraparound
R302 R303 R519 R521 R608 R614 R902 R906 R1013 R1014 R1044 R1045 R1305: "Fixed Resistor, Metal Glaze/thick Film, 0.05W, 0ohm, Surface Mount, 0201", Case/Package=0201, Manufacturer=Vishay, Max Operating Temperature=155°C, Medical Grade MFR=Mini-Systems, Medical Grade MFR PN=MWA96SM-0000F-NS62TR, Min Operating Temperature=-55°C, Package Height=0.23mm, Package Length=0.6mm, Package Shape=Rectangular, Package Style=SMTMeter, Package Width=0.3mm, Power=50mW, Rated Temperature=70°C, Resistor Type="FIXED RESISTOR", Supplier Part Number=541-0.0AGCT-ND, Supplier Part Number 1=541-0.0AGDKR-ND, Category="Chip SMD Resistors", ComponentLink1Description=https://datasheet.ciiva.com:443/pdfs/VipMasterIC/IC/VISH/VISH-S-A0002932828/VISH-S-A0002932828-1.pdf?src-supplier=IHS+Markit, ComponentLink1URL=https://datasheet.ciiva.com:443/pdfs/VipMasterIC/IC/VISH/VISH-S-A0002932828/VISH-S-A0002932828-1.pdf?src-supplier=IHS+Markit, ComponentLink2Description=https://datasheet.ciiva.com/2471/crcw0201e3-2471712.pdf?src-supplier=Digikey, ComponentLink2URL=https://datasheet.ciiva.com/2471/crcw0201e3-2471712.pdf?src-supplier=Digikey, ComponentLink3Description=https://datasheet.ciiva.com/7841/1719906-7841431.pdf?src-supplier=Element14, ComponentLink3URL=https://datasheet.ciiva.com/7841/1719906-7841431.pdf?src-supplier=Element14, ComponentLink4Description=https://datasheet.ciiva.com/7841/1719906-7841430.pdf?src-supplier=Element14, ComponentLink4URL=https://datasheet.ciiva.com/7841/1719906-7841430.pdf?src-supplier=Element14, ComponentLink5Description=https://datasheet.ciiva.com/22665/1847332-22665688.pdf?src-supplier=Element14, ComponentLink5URL=https://datasheet.ciiva.com/22665/1847332-22665688.pdf?src-supplier=Element14, ComponentLink6Description=https://datasheet.ciiva.com/2471/crcw0201e3-2471713.pdf?src-supplier=Digikey, ComponentLink6URL=https://datasheet.ciiva.com/2471/crcw0201e3-2471713.pdf?src-supplier=Digikey, ComponentLink7Description=https://datasheet.ciiva.com/2471/crcw0201e3-2471711.pdf?src-supplier=Digikey, ComponentLink7URL=https://datasheet.ciiva.com/2471/crcw0201e3-2471711.pdf?src-supplier=Digikey, ComponentLink8Description=https://datasheet.ciiva.com/16757/70202042-16757849.pdf?src-supplier=Allied+Electronics, ComponentLink8URL=https://datasheet.ciiva.com/16757/70202042-16757849.pdf?src-supplier=Allied+Electronics, ComponentLink9Description=https://datasheet.ciiva.com/16436/crcw0201e3-16436237.pdf?src-supplier=Future+Electronics, ComponentLink9URL=https://datasheet.ciiva.com/16436/crcw0201e3-16436237.pdf?src-supplier=Future+Electronics, Construction=Chip, JESD-609 Code=e3, Manufacturer Part Number=CRCW02010000Z0ED, Mounting Technology="Surface Mount", Packaging="Tape and Reel", Pins=2, Pricing="1=0,1, 10=0,034, 25=0,026, 50=0,0198, 100=0,0138, 250=0,01112, 500=0,0089, 1000=0,00655, 5000=0,0047 (USD)", Reach SVHC Compliant=Yes, Reference Standard=AEC-Q200, RoHS=Yes, RoHS Compliant=Yes, Stock=701366, Supplier=Digikey, Supplier 1=Digikey, Technology="METAL GLAZE/THICK FILM", Terminal Finish=Nickel, Termination=Wraparound
R304 R401 R714 R1400 R1403 R1407 R1408 R1411: "Resistor 200 1%, 0402, Non Implant-grade", Manufacturer=Vishay, Medical Grade Manufacturer=None, Power="200 mW", Supplier Part Number=TBD, Supplier Part Number 1=71-CRCW0402200RFKEDH, Temperature Coefficient="100 ppm/°C", Tolerance=1%, Voltage Rating=50V, Category=Resistor, Height=0.3mm, Length=1mm, Manufacturer Part Number=CRCW0402200RFKEDHP, Medical Grade Manufacturer Part Number=None, Size Code=0402, Supplier=TBD, Supplier 1=Mouser, Supplier 2=Digikey, Supplier 3=Digikey, Supplier 4=Digikey, Supplier Part Number 2=541-200YCT-ND, Supplier Part Number 3=541-200YDKR-ND, Supplier Part Number 4=541-200YTR-ND, Width=0.5mm
R400 R515 R517 R523 R600 R602 R609 R611 R613 R615 R624 R702 R703 R704 R705 R709 R712 R713 R803 R903 R915 R1000 R1002 R1003 R1004 R1007 R1008 R1009 R1010 R1016 R1017 R1019 R1020 R1031 R1032 R1034 R1038 R1039 R1041 R1048 R1049 R1050 R1051: "Fixed Resistor, Metal Glaze/thick Film, 0.05W, 10000000ohm, 30V, 1% +/-Tol, 200ppm/Cel, Surface Mount, 0201", Case/Package=0201, Manufacturer="Vishay Draloric", Max Operating Temperature=155°C, Medical Grade MFR=Mini-Systems, Medical Grade MFR PN=MWA96SM-1005F-NS62TR, Min Operating Temperature=-55°C, Package Shape=Rectangular, Power=50mW, Rated Temperature=70°C, Resistor Type="FIXED RESISTOR", Supplier Part Number=71-CRCW020110M0FNED, Supplier Part Number 1=541-CRCW020110M0FNEDCT-ND, Temperature Coefficient=200ppm/°C, Tolerance=1%, Working Voltage=30V, Category="Chip SMD Resistors", ComponentLink1Description=https://datasheet.ciiva.com:443/pdfs/VipMasterIC/IC/VISH/VISH-S-A0002932828/VISH-S-A0002932828-1.pdf?src-supplier=IHS+Markit, ComponentLink1URL=https://datasheet.ciiva.com:443/pdfs/VipMasterIC/IC/VISH/VISH-S-A0002932828/VISH-S-A0002932828-1.pdf?src-supplier=IHS+Markit, ComponentLink2Description=https://datasheet.ciiva.com/7673/1719906-7673177.pdf?src-supplier=Element14, ComponentLink2URL=https://datasheet.ciiva.com/7673/1719906-7673177.pdf?src-supplier=Element14, ComponentLink3Description=https://datasheet.ciiva.com/7673/1719906-7673178.pdf?src-supplier=Element14, ComponentLink3URL=https://datasheet.ciiva.com/7673/1719906-7673178.pdf?src-supplier=Element14, ComponentLink4Description=https://datasheet.ciiva.com/22692/1719906-22692711.pdf?src-supplier=Element14, ComponentLink4URL=https://datasheet.ciiva.com/22692/1719906-22692711.pdf?src-supplier=Element14, ComponentLink5Description=https://datasheet.ciiva.com/22665/1700795-22665701.pdf?src-supplier=Element14, ComponentLink5URL=https://datasheet.ciiva.com/22665/1700795-22665701.pdf?src-supplier=Element14, JESD-609 Code=e3, Manufacturer Part Number=CRCW020110M0FNED, Mounting Technology="Surface Mount", Packaging="Tape and Reel", Pins=2, Pricing="1=0,1, 10=0,024, 50=0,024, 100=0,014, 1000=0,011, 10000=0,006 (USD)", Reach SVHC Compliant=Yes, RoHS=Yes, RoHS Compliant=Yes, Stock=159754, Supplier=Mouser, Supplier 1=Digikey, Technology="METAL GLAZE/THICK FILM", Terminal Finish=Nickel, Termination=Wraparound
R402: "Resistor 200 1%, 0402, Non Implant-grade", Manufacturer=Vishay, Medical Grade Manufacturer=None, Supplier Part Number=TBD, Supplier Part Number 1=RMCF0402FT330R, Temperature Coefficient="100 ppm/°C", Tolerance=1%, Voltage Rating=50V, Category=Resistor, Height=0.3mm, Length=1mm, Manufacturer Part Number=CRCW0402200RFKEDHP, Medical Grade Manufacturer Part Number=None, Size Code=0402, Supplier=TBD, Supplier 1=Avnet, Width=0.5mm
R403: "Resistor, 0 Ohm, 0201, Metal element, Non-Implant grade,", Manufacturer=YAGEO, Medical Grade Manufacturer=-, Supplier Part Number=TBD, Supplier Part Number 1=YAG5755CT-ND, Temperature Coefficient="150 ppm/°C", Category=Resistor, Manufacturer Part Number=PA0201-R-070RL, Medical Grade Manufacturer Part Number=-, Size Code=0201, Supplier=TBD, Supplier 1=DigiKey
R500 R501 R503 R504 R506 R507 R513 R514 R522 R601 R603 R612 R616 R625 R626 R627 R628 R629 R630 R909 R911 R1024 R1025 R1027 R1037 R1056 R1058 R1149 R1152 R1410 R1502 R1503 R1504 R1505 R1506 R1507 R1508: "Fixed Resistor, Metal Glaze/thick Film, 0.05W, 1000000ohm, 30V, 1% +/-Tol, 200ppm/Cel, Surface Mount, 0201", Case/Package=0201, Manufacturer=Vishay, Max Operating Temperature=155°C, Medical Grade MFR=Mini-Systems, Medical Grade MFR PN=MWA96SM-1004F-NS62TR, Min Operating Temperature=-55°C, Package Height=0.23mm, Package Length=0.6mm, Package Shape=Rectangular, Package Style=SMTMeter, Package Width=0.3mm, Power=50mW, Rated Temperature=70°C, Resistor Type="FIXED RESISTOR", Supplier Part Number=541-1.00MABCT-ND, Temperature Coefficient=200ppm/°C, Tolerance=1%, Working Voltage=30V, Category="Chip SMD Resistors", ComponentLink1Description=https://datasheet.ciiva.com:443/pdfs/VipMasterIC/IC/VISH/VISH-S-A0002932828/VISH-S-A0002932828-1.pdf?src-supplier=IHS+Markit, ComponentLink1URL=https://datasheet.ciiva.com:443/pdfs/VipMasterIC/IC/VISH/VISH-S-A0002932828/VISH-S-A0002932828-1.pdf?src-supplier=IHS+Markit, ComponentLink2Description=https://datasheet.ciiva.com/7841/1719906-7841438.pdf?src-supplier=Element14, ComponentLink2URL=https://datasheet.ciiva.com/7841/1719906-7841438.pdf?src-supplier=Element14, ComponentLink3Description=https://datasheet.ciiva.com/7841/1719906-7841439.pdf?src-supplier=Element14, ComponentLink3URL=https://datasheet.ciiva.com/7841/1719906-7841439.pdf?src-supplier=Element14, ComponentLink4Description=https://datasheet.ciiva.com/7859/dcrcwe3-7859689.pdf?src-supplier=Element14, ComponentLink4URL=https://datasheet.ciiva.com/7859/dcrcwe3-7859689.pdf?src-supplier=Element14, ComponentLink5Description=https://datasheet.ciiva.com/16757/70202042-16757675.pdf?src-supplier=Allied+Electronics, ComponentLink5URL=https://datasheet.ciiva.com/16757/70202042-16757675.pdf?src-supplier=Allied+Electronics, ComponentLink6Description=https://datasheet.ciiva.com/22692/1719906-22692761.pdf?src-supplier=Element14, ComponentLink6URL=https://datasheet.ciiva.com/22692/1719906-22692761.pdf?src-supplier=Element14, ComponentLink7Description=https://datasheet.ciiva.com/9109/crcw0201e3-9109910.pdf?src-supplier=Avnet, ComponentLink7URL=https://datasheet.ciiva.com/9109/crcw0201e3-9109910.pdf?src-supplier=Avnet, ComponentLink8Description=https://datasheet.ciiva.com/22675/1847332-22675065.pdf?src-supplier=Element14, ComponentLink8URL=https://datasheet.ciiva.com/22675/1847332-22675065.pdf?src-supplier=Element14, ComponentLink9Description=https://datasheet.ciiva.com/2474/crcw0201e3-2474824.pdf?src-supplier=Digikey, ComponentLink9URL=https://datasheet.ciiva.com/2474/crcw0201e3-2474824.pdf?src-supplier=Digikey, ComponentLink10Description=https://datasheet.ciiva.com/2474/crcw0201e3-2474825.pdf?src-supplier=Digikey, ComponentLink10URL=https://datasheet.ciiva.com/2474/crcw0201e3-2474825.pdf?src-supplier=Digikey, ComponentLink11Description=https://datasheet.ciiva.com/2474/crcw0201e3-2474826.pdf?src-supplier=Digikey, ComponentLink11URL=https://datasheet.ciiva.com/2474/crcw0201e3-2474826.pdf?src-supplier=Digikey, Construction=Chip, JESD-609 Code=e3, Manufacturer Part Number=CRCW02011M00FNED, Mounting Technology="Surface Mount", Packaging="Tape and Reel", Pins=2, Pricing="1=0,1, 10=0,037, 50=0,0242, 100=0,0204, 500=0,01426, 1000=0,01241, 5000=0,00924 (USD)", Reach SVHC Compliant=Yes, Reference Standard=AEC-Q200, RoHS=Yes, RoHS Compliant=Yes, Stock=392914, Supplier=Digikey, Supplier 1=Digikey, Supplier Part Number 1=541-1.00MABCT-ND, Technology="METAL GLAZE/THICK FILM", Terminal Finish=Nickel, Termination=Wraparound